# Altium PCB ft2232d.PcbDoc
Units mm, origin at the board's own origin, x right, y up, seen from the top; angles counter-clockwise.
Board outline 44.58 x 20.07 mm, 2 copper layers (Top Layer, Bottom Layer); 33 components, 27 nets, 138 pads, 24 vias.
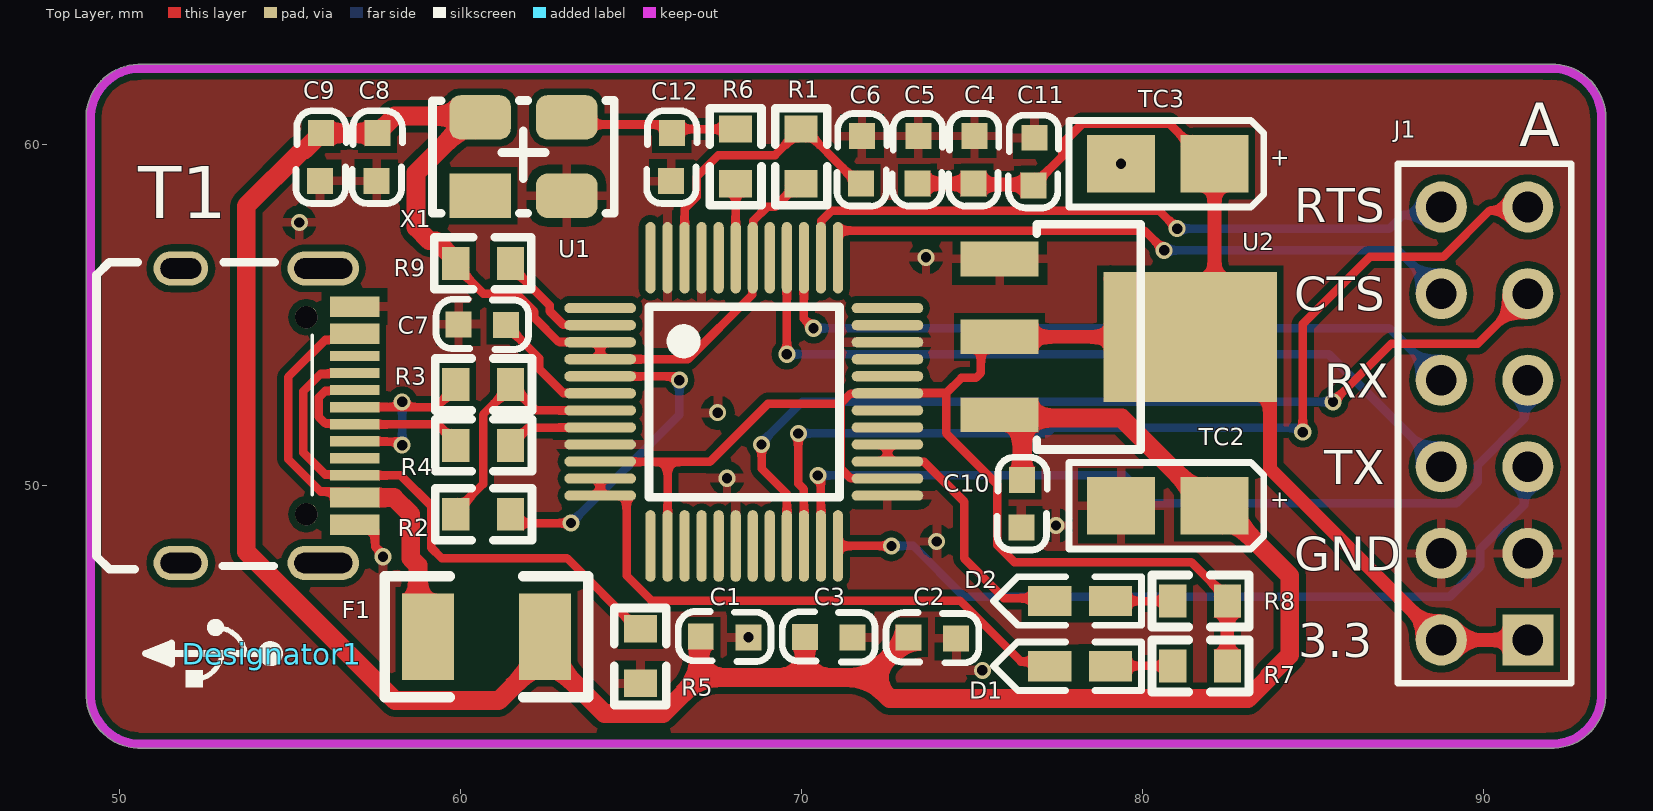
[diagram p0: Top Layer view]
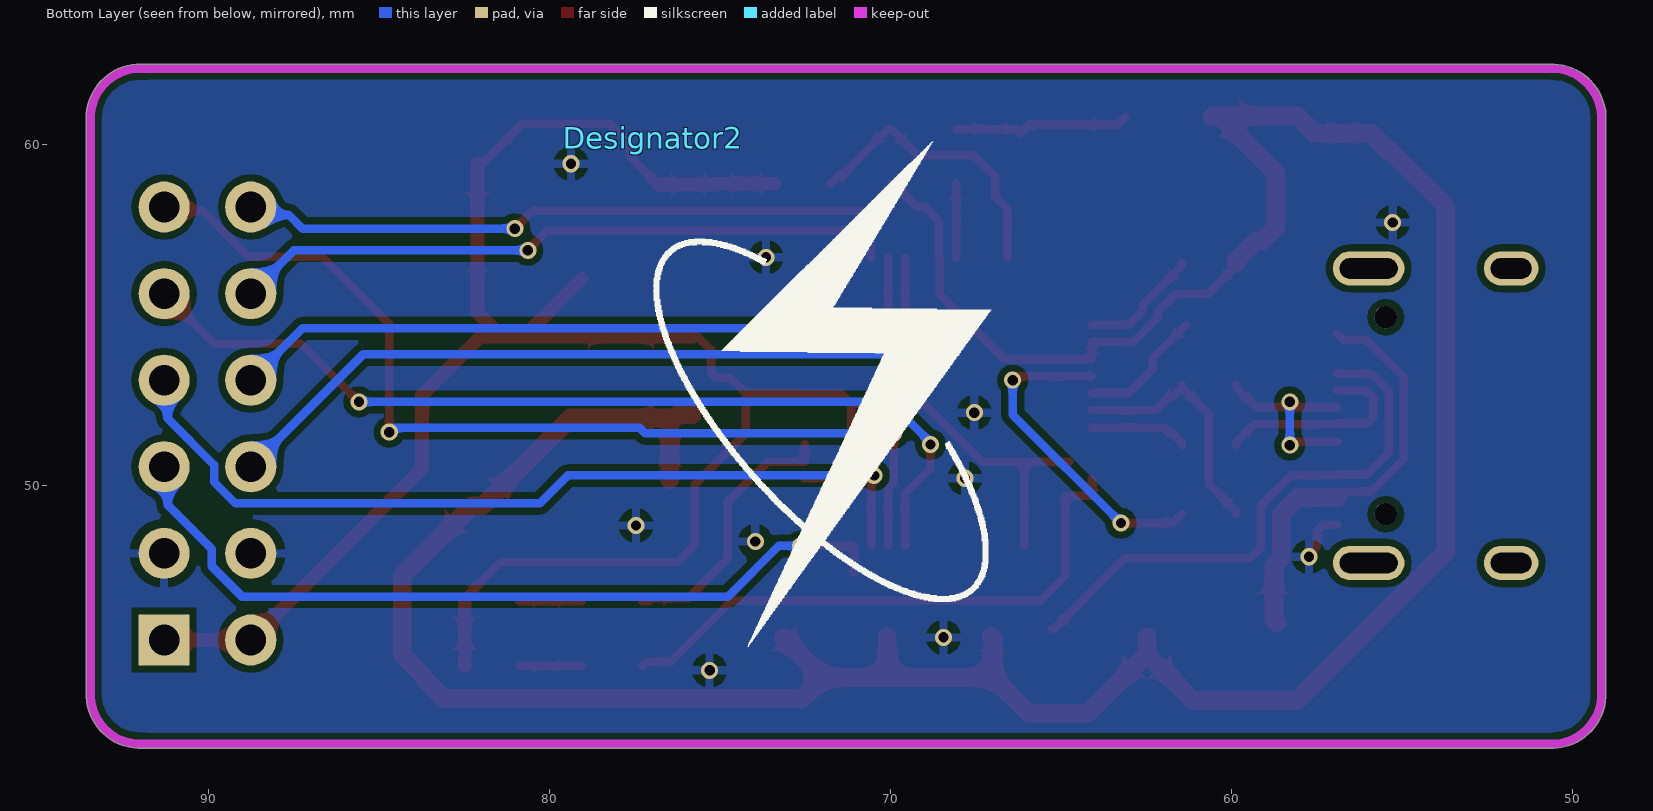
[diagram p1: Bottom Layer view, seen from below]

## Layer stack, top to bottom
Top Solder: solder mask 0.0102, Solder Resist, Dk 3.5
Top Layer: signal copper 0.0356
Dielectric 1: dielectric 0.32, FR-4, Dk 4.8
Bottom Layer: signal copper 0.0356
Bottom Solder: solder mask 0.0102, Solder Resist, Dk 3.5

## Board outline
50.54,42.291 ccw(c50.609,43.878) 50.54,42.291 cw(c50.609,43.878) 49.022,43.945 49.022,60.96 cw(c49.149,60.96) 49.041,61.028 cw(c50.609,60.77) 50.676,62.357 91.818,62.357 cw(c91.818,62.23) 91.857,62.351 cw(c92.011,60.77) 93.601,60.77 cw(c92.011,60.77) 93.599,60.703 93.599,43.815 cw(c93.472,43.815) 93.599,43.809 cw(c92.011,43.878) 91.945,42.291 50.546,42.291 cw(c50.546,42.418)

## Design rules (kind name [scope] priority, off if disabled: settings)
Clearance [All] p1: gap=0.2 ignorepadtopadclearanceinfootprint=TRUE
DiffPairsRouting [All] p1: maxlimit=0.254 minlimit=0.22 mostfreqgap=0.254 toplayer_minwidth=0.25 toplayer_maxwidth=0.25 toplayer_prefwidth=0.25 bottomlayer_minwidth=0.25 bottomlayer_maxwidth=0.25 bottomlayer_prefwidth=0.25 maxuncoupledlength=12.7
PlaneClearance [All] p1: clearance=0.25
PolygonConnect [All] p1: connectstyle=Relief reliefconductorwidth=0.254 reliefentries=4 polygonreliefangle="90 Angle" airgapwidth=0.254
RoutingVias [All] p1: holewidth=0.711 width=1.27 viastyle="Through Hole" minholewidth=0.711 minwidth=1.27 maxholewidth=0.711 maxwidth=1.27
SolderMaskExpansion [All] p1: expansion=0.102
Width Width_3 [InNet('3.3V')] p1: maxlimit=0.4 minlimit=0.25 preferedwidth=0.4
Width Width_2 [InNet('USB_5V')] p2: maxlimit=0.55 minlimit=0.25 preferedwidth=0.55
Width Width_1 [InNet('5V')] p3: maxlimit=0.55 minlimit=0.25 preferedwidth=0.55
Width [All] p4: maxlimit=0.25 minlimit=0.25 preferedwidth=0.25
28 further rules are at their usual default settings.

## Classes and differential pairs
component class ft2232d: C1 C2 C3 C4 C5 C6 C7 C8 C9 C10 C11 C12 D1 D2 F1 J1 R1 R2 R3 R4 R5 R6 R7 R8 R9 T1 TC2 TC3 U1 U2 X1
differential pair USBR_D: +USBR_D_P -USBR_D_N
differential pair USB_D: +USB_D_P -USB_D_N

## Components (designator, comment, footprint, x,y, rotation, side; value= is the part's Value field where it differs from the comment)
C1 "0.1uf" 0603C 68.453,45.535 r180 top
C2 "0.1uf" 0603C 74.549,45.5 r180 top
C3 "0.1uf" 0603C 71.506,45.526 r180 top
C4 "0.1uf" 0603C 75.091,60.254 r270 top
C5 "0.1uf" 0603C 73.44,60.254 r270 top
C6 "0.1uf" 0603C 71.746,58.847 r90 top
C7 "33uf" 0603C 61.346,54.692 r180 top
C8 "102" 0603C 57.531,58.928 r90 top
C9 "102" 0603C 55.88,58.928 r90 top
C10 "0.1uf" 0603C 76.445,48.763 r90 top
C11 "0.1uf" 0603C 76.844,60.203 r270 top
C12 "15pf" 0603C 66.167,58.928 r90 top
D1 "LED" LED-0603B 79.07,44.704 r180 top
D2 "LED" LED-0603B 79.07,46.616 r180 top
Designator1 "Comment" USB_LOGO 54.483,45.067 r90 top
Designator2 "Comment" LOGO_Thunder 76.962,60.198 r180 bottom
F1 "FUSE" FUSE-1210 59.106,45.509 r0 top
J1 "Pin HDR2X6" "Pin HDR2X6/2.54mm-S" 91.313,45.466 r90 top
R1 "470R" 0603R 69.994,58.852 r90 top
R2 "1K5" 0603R 61.468,49.155 r180 top
R3 "27R" 0603R 61.468,52.959 r180 top
R4 "27R" 0603R 61.468,51.176 r180 top
R5 "5K1" 0603R 65.278,44.196 r90 top
R6 "33R" 0603R 68.072,58.852 r90 top
R7 "220R" 0603R 82.499,44.704 r180 top
R8 "220R" 0603R 82.499,46.609 r180 top
R9 "10K" 0603R 59.868,56.515 r0 top
T1 "USB-TYPE-C-12P" type-c-12p 52.959,52.578 r0 top
TC2 "10uf" TAJ-A/3216 82.169,49.403 r180 top
TC3 "10uf" TAJ-A/3216 82.169,59.436 r180 top
U1 "FD2232D" "LQFP48 7X7" 68.326,52.451 r270 top
U2 "AMS1117" SOT223 75.819,54.356 r270 top
X1 "XTAL-ACT-4P" OSC-5032-4P-2 61.849,59.817 r0 top

## Footprints (in the part's own frame and the unit in brackets; to place one, negate y for a bottom-side part, rotate by r counter-clockwise, add the part's x,y. Pads: shape width x height; smd on the part's side, far side on the other; paste and mask are expansions set on the pad)
0603C [mil]
  rect 30x30 smd: 1(0.21,-0.35) 2(55.21,-1.35)
  silkscreen extent -26,-30 81,28, body extent -1,-15 62,17, height 12
0603R [mm]
  rect 0.8x0.965 smd: 1(0,0) 2(1.6,0)
  silkscreen extent -0.64,-0.76 2.21,0.76, body extent -0.04,-0.41 1.56,0.41, height 0.45
FUSE-1210 [mil]
  rect 60x100 smd: 1(-2,2) 2(133,2)
  silkscreen extent -52,-68 183,72, body extent 8,-49 134,53, height 27
LED-0603B [mil]
  rect 50x35 smd: A(0,0.26) K(70,0.26)
  silkscreen extent -36,-28 135,28, body extent 4,-15 66,17, height 24
LOGO_Thunder [mm]
  silkscreen extent 0,-14.94 9.91,-0.13
"LQFP48 7X7" [mm]
  oval 0.3x2.1 smd: 1(-2.75,-4.227) 2(-2.25,-4.227) 3(-1.75,-4.227) 4(-1.25,-4.227) 5(-0.75,-4.227) 6(-0.25,-4.227) 7(0.25,-4.227) 8(0.75,-4.227) 9(1.25,-4.227) 10(1.75,-4.227) 11(2.25,-4.227) 12(2.75,-4.227) 25(2.75,4.202) 26(2.25,4.202) 27(1.75,4.202) 28(1.25,4.202) 29(0.75,4.202) 30(0.25,4.202) 31(-0.25,4.202) 32(-0.75,4.202) 33(-1.25,4.202) 34(-1.75,4.202) 35(-2.25,4.202) 36(-2.75,4.202)
  oval 2.1x0.3 smd: 13(4.227,-2.75) 14(4.227,-2.25) 15(4.227,-1.75) 16(4.227,-1.25) 17(4.227,-0.75) 18(4.227,-0.25) 19(4.227,0.25) 20(4.227,0.75) 21(4.227,1.25) 22(4.227,1.75) 23(4.227,2.25) 24(4.227,2.75) 37(-4.227,2.75) 38(-4.227,2.25) 39(-4.227,1.75) 40(-4.227,1.25) 41(-4.227,0.75) 42(-4.227,0.25) 43(-4.227,-0.25) 44(-4.227,-0.75) 45(-4.227,-1.25) 46(-4.227,-1.75) 47(-4.227,-2.25) 48(-4.227,-2.75)
  silkscreen extent -2.79,-2.79 2.79,2.79, body extent -4.51,-4.5 4.5,4.5, height 1.45
OSC-5032-4P-2 [mm]
  rect 1.8x1.3 smd: 1(-1.27,-1.321)
  rrect50% 1.8x1.3 smd: 2(1.27,-1.321) 3(1.27,0.979) 4(-1.27,0.979)
  silkscreen extent -2.67,-1.83 2.67,1.47, body extent -2.5,-1.73 2.5,1.47, height 1.18
"Pin HDR2X6/2.54mm-S" [mm] "Connector; Header; 6x2 Position"
  rect 1.5x1.5 hole 0.9: 1(0,0)
  round 1.5 hole 0.9: 2(0,2.54) 3(2.54,0) 4(2.54,2.54) 5(5.08,0) 6(5.08,2.54) 7(7.62,0) 8(7.62,2.54) 9(10.16,0) 10(10.16,2.54) 11(12.7,0) 12(12.7,2.54)
  silkscreen extent -1.27,-1.27 13.97,3.81, body extent -1.27,-1.27 13.97,3.81, height 7.58
SOT223 [mil]
  rect 40x90 smd: 1(-90,0) 2(0,0) 3(90,0)
  rect 150x200 smd: 2(0,220)
  silkscreen extent -130,43 130,163, body extent -130,-30 126,246, height 65
TAJ-A/3216 [mm]
  rect 2x1.7 smd: 1(0.047,0) 2(2.794,0)
  silkscreen extent -1.4,-1.27 4.32,1.27, body extent -0.2,-0.8 3,0.8, height 1.6
type-c-12p [mm]
  oval 1.6x1 hole 0.6 slot 1.2 at 0 deg: 0(-1.158,-4.853) 0(-1.158,3.787)
  oval 2.1x1 hole 0.6 slot 1.7 at 0 deg: 0(3.022,-4.853) 0(3.022,3.787)
  round 0.66 hole 0.66: 4(2.522,-3.423) 4(2.522,2.357)
  rect 1.45x0.6 smd: A1B12(3.937,2.667) A4B9(3.937,1.867) B1A12(3.937,-3.733) B4A9(3.937,-2.933)
  rect 1.45x0.3 smd: A5(3.937,0.717) A6(3.937,-0.283) A7(3.937,-0.783) A8(3.937,-1.783) B5(3.937,-2.283) B6(3.937,-1.283) B7(3.937,0.217) B8(3.937,1.217)
  silkscreen extent -3.63,-5.03 2.69,3.97, body extent -3.57,-4.95 4.33,3.99, height 3.2
USB_LOGO [mm]
  silkscreen extent -0.99,-0.12 0.89,3.71

## Part data
C1 C2 C3 C4 C5 C6 C7 C8 C9 C10 C11 C12: library part CAP, "无极性电容"
R1 R2 R3 R4 R5 R6 R7 R8 R9: library part RES, "贴片电阻"
TC2 TC3: library part TCAP, "钽电容"
U2: "三端稳压芯片"
X1: "4脚有源晶振"

## Via types
v1: diameter 0.5, hole 0.3, Top Layer to Bottom Layer, 24 vias

## Nets (pads, with @x,y where several pads share a name; then routed paths per layer and width w, separated by ;. In a path a pad name is that pad's centre, name@x,y a point inside that pad or via, vN(x,y) a via of type N, cw(c..) or ccw(c..) an arc to the next point about the centre after c; other vN are vias at no path point)
3.3V: C4.2 C5.2 C11.2 J1.1 J1.2 R7.1 R8.1 TC3.1 U1.10 U1.14 U1.26 U1.31 U2.2 | length 71.7
  Top Layer w0.25: U1.10@64.77,50.691 66.076,50.691 ; U1.14 66.076,50.691 ; U1.26 72.518,50.211 71.446,50.211 71.153,50.504 71.153,52.398 ; 74.24,52.711 72.537,52.711 U1.31 72.518,52.691 71.446,52.691 71.153,52.398 ; U2.2@75.819,54.356 75.653,54.356 75.27,53.973 75.27,53.299 75.123,53.152 74.695,53.152 74.253,52.711 74.253,51.525 75.748,50.03 75.748,48.252 76.248,47.752 81.438,47.752 82.499,46.691 R8.1 ; C11.2 77.653,59.644 77.653,60.024 78.24,60.611 80.797,60.611 81.972,59.436 TC3.1 ; 66.076,50.691 67.313,50.691 69.02,52.398 71.153,52.398
  Top Layer w0.4: C5.2 C4.2 75.083,58.827 76.784,58.827 C11.2 ; U2.2@75.819,54.356 U2.2@80.772,54.356 ; U2.2@79.067,56.061 U2.2@80.772,54.356 ; TC3.1 82.122,55.071 U2.2@81.407,54.356 ; R7.1 R8.1 ; J1.1 J1.2 83.747,50.492 83.747,52.651 82.042,54.356 U2.2@81.407,54.356 ; U2.2@80.772,54.356 U2.2@81.407,54.356
5V: C1.2 C2.2 C3.2 C8.2 C9.2 C10.2 F1.2 R1.1 R9.1 TC2.1 U1.3 U1.4 U1.42 U2.3 X1.4 | length 93
  Top Layer w0.25: R9.1 59.868,56.433 60.676,55.625 61.639,55.625 62.172,55.092 62.172,54.92 62.881,54.211 64.089,54.211 U1.3 U1.4 66.671,53.701 68.566,55.597 68.566,56.668 U1.42 68.586,56.688 68.586,57.759 69.002,58.176 69.236,58.176 69.912,58.852 R1.1
  Top Layer w0.55: R9.1 59.868,56.597 59.288,57.177 59.09,57.177 58.701,57.566 58.701,59.168 X1.4@60.368,60.835 ; X1.4 60.54,60.835 X1.4@60.368,60.835 ; F1.2 F1.2@62.484,45.052 ; C1.2 66.999,45.518 66.999,44.363 ; C3.2 70.104,44.363 ; C2.2 71.975,44.363 ; U2.3 76.246,52.07 U2.3@76.34,51.976 ; C10.2 76.479,51.837 U2.3@76.34,51.976 ; X1.4@60.368,60.835 58.07,60.835 C8.2 C9.2 55.419,59.835 55.357,59.835 53.721,58.199 53.721,48.056 58.089,43.688 61.12,43.688 F1.2@62.484,45.052 ; F1.2@62.484,45.052 64.229,43.307 65.943,43.307 66.999,44.363 ; 66.999,44.363 70.104,44.363 ; 70.104,44.363 71.975,44.363 ; 71.975,44.363 72.592,43.747 83.096,43.747 83.712,44.363 83.712,44.41 84.328,45.026 84.328,47.347 82.272,49.403 TC2.1 81.972,49.403 79.399,51.976 U2.3@76.34,51.976
A_CTS: J1.9 U1.21 | length 27.6
  Top Layer w0.25: v1(68.834,51.201) 68.834,50.493 69.576,49.751 U1.21 ; v1(85.598,52.451) 87.308,54.161 89.848,54.161 J1.9
  Bottom Layer w0.25: v1(68.834,51.201) 68.834,51.261 70.024,52.451 v1(85.598,52.451)
A_LED: D1.K U1.11 U1.12 | length 17.1
  Top Layer w0.25: U1.11 U1.12 64.851,49.701 64.874,49.678 64.874,47.354 65.606,46.622 74.652,46.622 76.444,44.831 77.158,44.831 D1.K
A_RTS: J1.11 U1.22 | length 29.5
  Top Layer w0.25: v1(69.912,51.525) 69.91,51.524 69.91,50.054 70.076,49.888 U1.22 ; v1(84.709,51.562) 84.709,54.737 86.673,56.701 88.828,56.701 90.188,58.061 91.208,58.061 J1.11
  Bottom Layer w0.25: v1(69.912,51.525) 77.199,51.525 77.362,51.689 84.582,51.689 v1(84.709,51.562)
A_RX: J1.7 U1.23 | length 25.7
  Top Layer w0.25: v1(70.485,50.292) 70.576,50.201 U1.23
  Bottom Layer w0.25: v1(70.485,50.292) 79.475,50.292 80.296,49.471 89.218,49.471 89.848,50.101 89.848,50.601 91.208,51.961 91.208,52.981 J1.7
A_TX: J1.5 U1.24 | length 24.1
  Top Layer w0.25: U1.24@71.099,47.449 71.076,47.472 U1.24 v1(72.644,48.224)
  Bottom Layer w0.25: v1(72.644,48.224) 73.287,48.224 74.775,46.736 89.023,46.736 89.914,47.627 89.914,48.131 91.204,49.421 91.204,50.437 J1.5
B_CTS: J1.10 U1.37 | length 19.3
  Top Layer w0.25: U1.37@71.099,56.597 71.076,56.621 U1.37 71.076,57.452 71.099,57.475 80.066,57.475 v1(80.645,56.896)
  Bottom Layer w0.25: v1(80.645,56.896) 87.503,56.896 J1.10
B_LED: D2.K U1.27 U1.28 | length 7.9
  Top Layer w0.25: U1.28 U1.27 72.537,50.691 73.609,50.691 74.777,49.523 74.777,47.86 75.946,46.691 77.019,46.691 77.101,46.609 D2.K
B_RTS: J1.12 U1.38 | length 19.9
  Top Layer w0.25: U1.38 70.586,56.688 70.586,57.759 70.879,58.053 80.504,58.053 v1(81.026,57.531)
  Bottom Layer w0.25: v1(81.026,57.531) 87.249,57.531 87.648,57.93 88.537,57.93 J1.12
B_RX: J1.8 U1.39 | length 21.2
  Top Layer w0.25: U1.39 70.076,54.892 v1(70.358,54.61)
  Bottom Layer w0.25: v1(70.358,54.61) 87.249,54.61 J1.8
B_TX: J1.6 U1.40 | length 23.4
  Top Layer w0.25: v1(69.576,53.848) U1.40
  Bottom Layer w0.25: v1(69.576,53.848) 85.471,53.848 J1.6
GND: C1.1 C2.1 C3.1 C4.1 C5.1 C6.2 C7.2 C8.1 C9.1 C10.1 C11.1 C12.1 J1.3 J1.4 R5.1 T1.A1B12 T1.B1A12 TC2.2 TC3.2 U1.9 U1.18 U1.25 U1.34 U1.45 U1.47 U2.1 X1.2 | length 1.5
  Top Layer w0.25: T1.B1A12 57.321,48.845 57.496,48.67 57.496,48.207 57.728,47.975 v1(57.728,47.908)
  other v1: 75.311,44.577 68.448,45.544 73.971,48.353 77.47,48.826 67.818,50.211 67.548,52.134 73.66,56.692 55.274,57.715 79.375,59.436
NetC6_1: C6.1 R1.2 U1.46 | length 8.6
  Top Layer w0.25: U1.46 66.576,58.112 66.929,58.465 66.929,59.051 67.568,59.69 69.232,59.69 R1.2 70.077,60.452 71.421,59.108 71.499,59.108 C6.1
NetC7_1: C7.1 U1.6 | length 3.8
  Top Layer w0.25: C7.1 62.307,53.735 62.307,53.421 63.018,52.711 64.089,52.711 U1.6
NetC12_2: C12.2 R6.2 X1.3 | length 5.2
  Top Layer w0.25: X1.3 63.329,60.586 65.945,60.586 C12.2 66.323,60.452 R6.2
NetD1_A: D1.A R7.2 | length 1.8
  Top Layer w0.25: D1.A 79.076,44.704 R7.2
NetD2_A: D2.A R8.2 | length 1.8
  Top Layer w0.25: D2.A R8.2
NetR2_1: R2.1 U1.5 | length 9.8
  Top Layer w0.25: R2.1 61.728,48.895 v1(63.246,48.895) ; U1.5 66.306,53.201 v1(66.421,53.086)
  Bottom Layer w0.25: v1(63.246,48.895) 66.421,52.07 v1(66.421,53.086)
NetR5_2: R5.2 T1.A5 T1.B5 | length 16.3
  Top Layer w0.25: T1.A5 56.871,53.27 55.9,53.27 55.396,52.766 55.396,50.96 56.036,50.32 56.871,50.32 T1.B5 58.25,50.295 59.143,49.402 59.143,48.172 59.448,47.867 63.125,47.867 65.196,45.796 R5.2
NetR6_1: R6.1 U1.43 | length 2.2
  Top Layer w0.25: R6.1 68.076,58.848 U1.43
NetR9_2: R9.2 U1.2 | length 3.5
  Top Layer w0.25: R9.2 61.468,56.433 62.622,55.279 62.622,55.106 63.018,54.711 64.089,54.711 U1.2
USB_5V: F1.1 T1.A4B9 T1.B4A9 | length 12.4
  Top Layer w0.25: T1.B4A9 56.721,49.82 55.9,49.82 54.946,50.774 54.946,53.18 56.036,54.27 56.721,54.27 T1.A4B9
  Top Layer w0.55: T1.B4A9 58.051,49.645 58.543,49.153 58.543,47.867 58.754,47.655 58.754,46.054 F1.1@58.674,45.974
USB_D_N: R4.2 T1.A7 T1.B7 | length 6.1
  Top Layer w0.25: T1.B7 56.871,52.77 56.036,52.77 55.846,52.58 55.846,52.01 56.036,51.82 56.871,51.82 T1.A7 56.9,51.791 59.336,51.791 59.868,51.258 R4.2
USB_D_P: R3.2 T1.A6 T1.B6 | length 5.9
  Top Layer w0.25: T1.B6 56.904,51.287 v1@58.264,51.287 ; T1.A6 59.287,52.295 59.868,52.877 R3.2
  Bottom Layer w0.25: v1(58.293,51.181) v1(58.293,52.451)
USBR_D_N: R4.1 U1.8 | length 2.9
  Top Layer w0.25: R4.1 61.468,51.258 61.743,51.533 61.825,51.533 61.989,51.697 64.095,51.697 U1.8
USBR_D_P: R2.2 R3.1 U1.7 | length 7.4
  Top Layer w0.25: R2.2 59.868,49.237 60.668,50.037 60.668,52.077 R3.1@61.468,52.877 ; R3.1 R3.1@61.468,52.877 ; U1.7 62.226,52.201 61.825,52.602 61.743,52.602 R3.1@61.468,52.877
pads on no net: T1.0 T1.4 T1.A8 T1.B8 U1.1 U1.13 U1.15 U1.16 U1.17 U1.19 U1.20 U1.29 U1.30 U1.32 U1.33 U1.35 U1.36 U1.41 U1.44 U1.48 X1.1

## Polygon pours and split planes (outlines as drawn)
GND on Top Layer (solid, remove dead copper, pour order 18): 48.133,63.627 94.361,63.627 95.25,62.738 94.615,62.103 94.615,41.148 48.133,41.148 47.879,40.894
GND on Top Layer "Top Layer-GND 1" (solid, pour order 14): 51.562,41.021
GND on Top Layer "Top Layer-GND 2" (solid, pour order 10): 47.879,40.894
GND on Top Layer "Top Layer-GND 3" (solid, pour order 6): 58.039,39.37
no net on Top Layer "Top Layer-No Net" (solid, pour order 2): 60.706,39.37
GND on Bottom Layer (solid, remove dead copper, pour order 22): 47.244,63.5 47.371,63.373 95.885,63.373 95.885,41.402 95.123,40.64 94.615,41.148 47.879,41.148

## Keep-outs
Keep-Out Layer:
  lines w0.254: 49.149,60.833 cw(c50.609,60.77) 50.673,62.23 91.818,62.23 ; 49.149,60.96 49.149,43.942 ccw(c50.609,43.878) 50.546,42.418 91.948,42.418 ccw(c92.011,43.878) 93.472,43.815 93.472,60.706 ccw(c92.011,60.77) 91.818,62.219

## Silkscreen, mask and mechanical layers (free items; w line width, h text height)
Top Overlay:
  text "RTS" at 84.455,57.715 h1
  text "CTS" at 84.455,55.118 h1
  text "RX" at 85.344,52.578 h1
  text "TX" at 85.344,50.038 h1
  text "GND" at 84.455,47.498 h1
  text "3.3" at 84.582,44.958 h1

## Dimensions
46.228,62.357 to 45.72,42.418 on Top Overlay
49.041,61.028 to 93.599,62.611 on Top Overlay

## Text inside footprints (layer, text, board x,y; h text height)
J1: Top Overlay "A" at 91.059,59.944 h1.27
TC2: Top Overlay "+" at 84.328,49.784 h0.5 r180
TC3: Top Overlay "+" at 84.328,59.817 h0.5 r180